# Altium PCB FrontLights.PcbDoc
Units mil, origin at the board's own origin, x right, y up, seen from the top; angles counter-clockwise.
Board outline 6000 x 4000 mil, 4 copper layers (Top Layer, GND, PWR, Bottom Layer), stack 18.512 mil thick; 29 components, 20 nets, 146 pads, 31 vias.
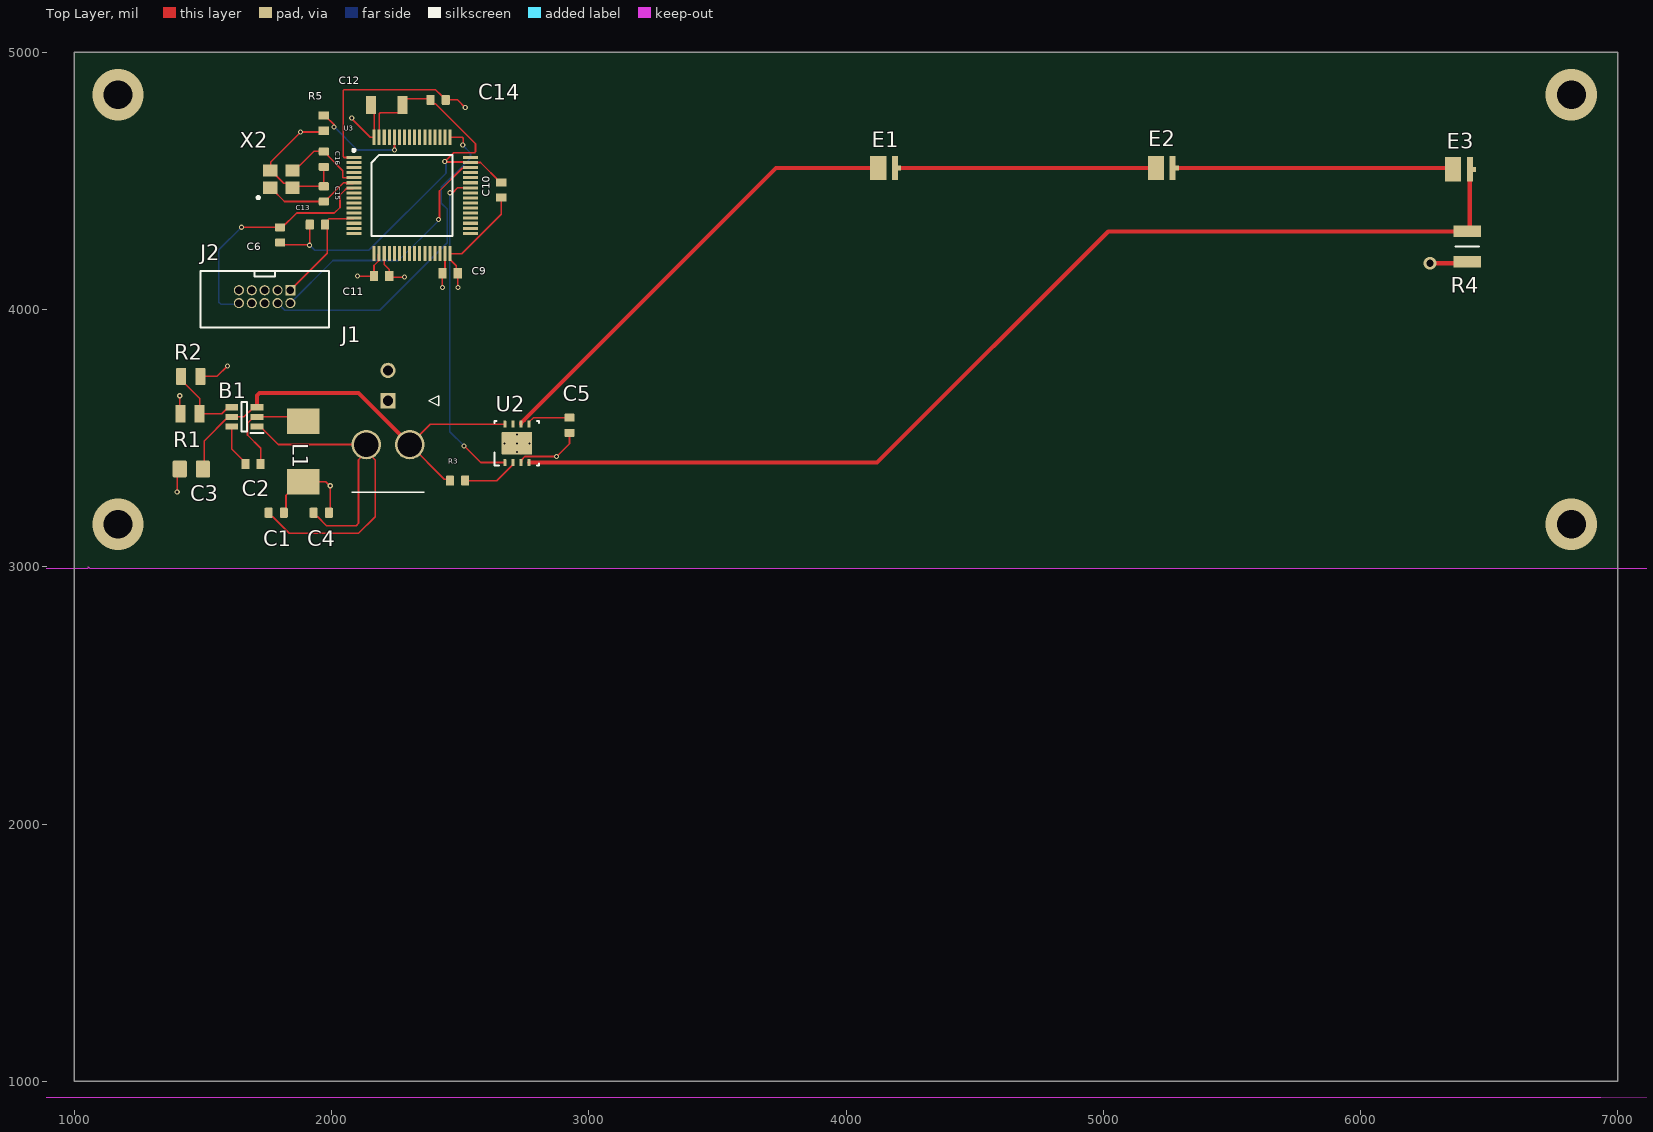
[diagram p0: Top Layer view]
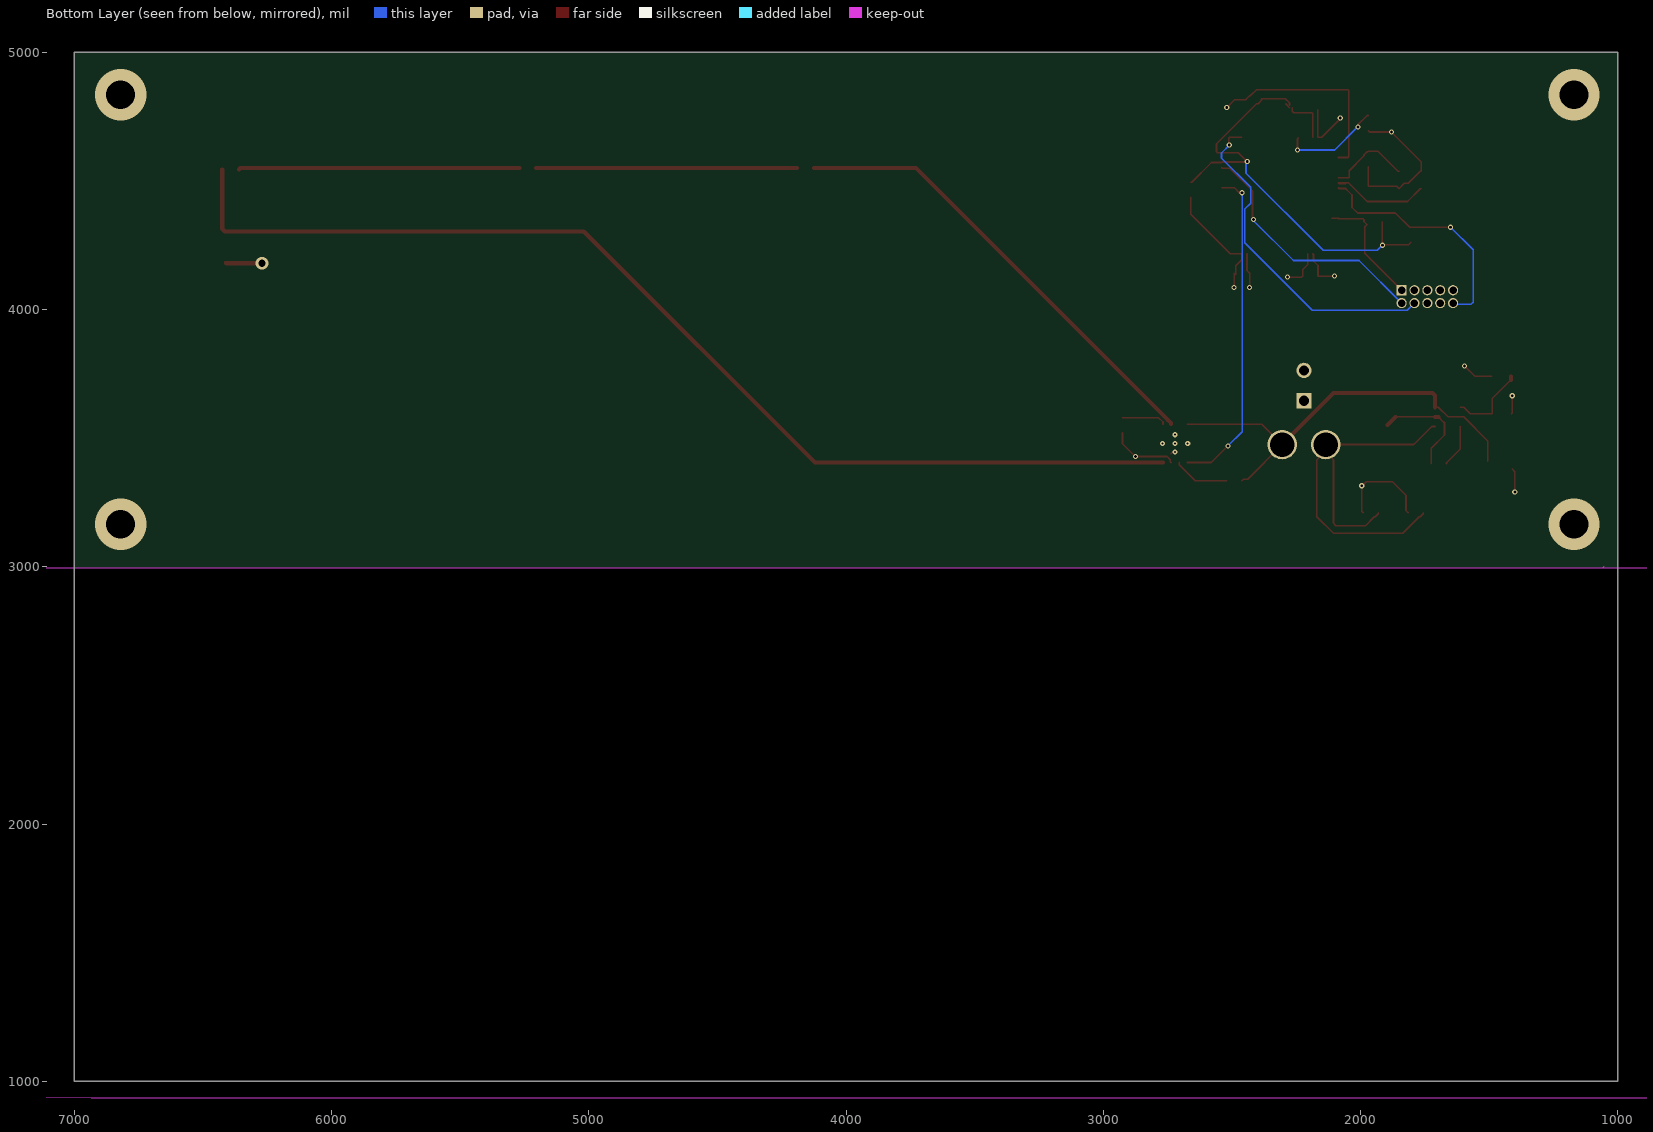
[diagram p1: Bottom Layer view, seen from below]
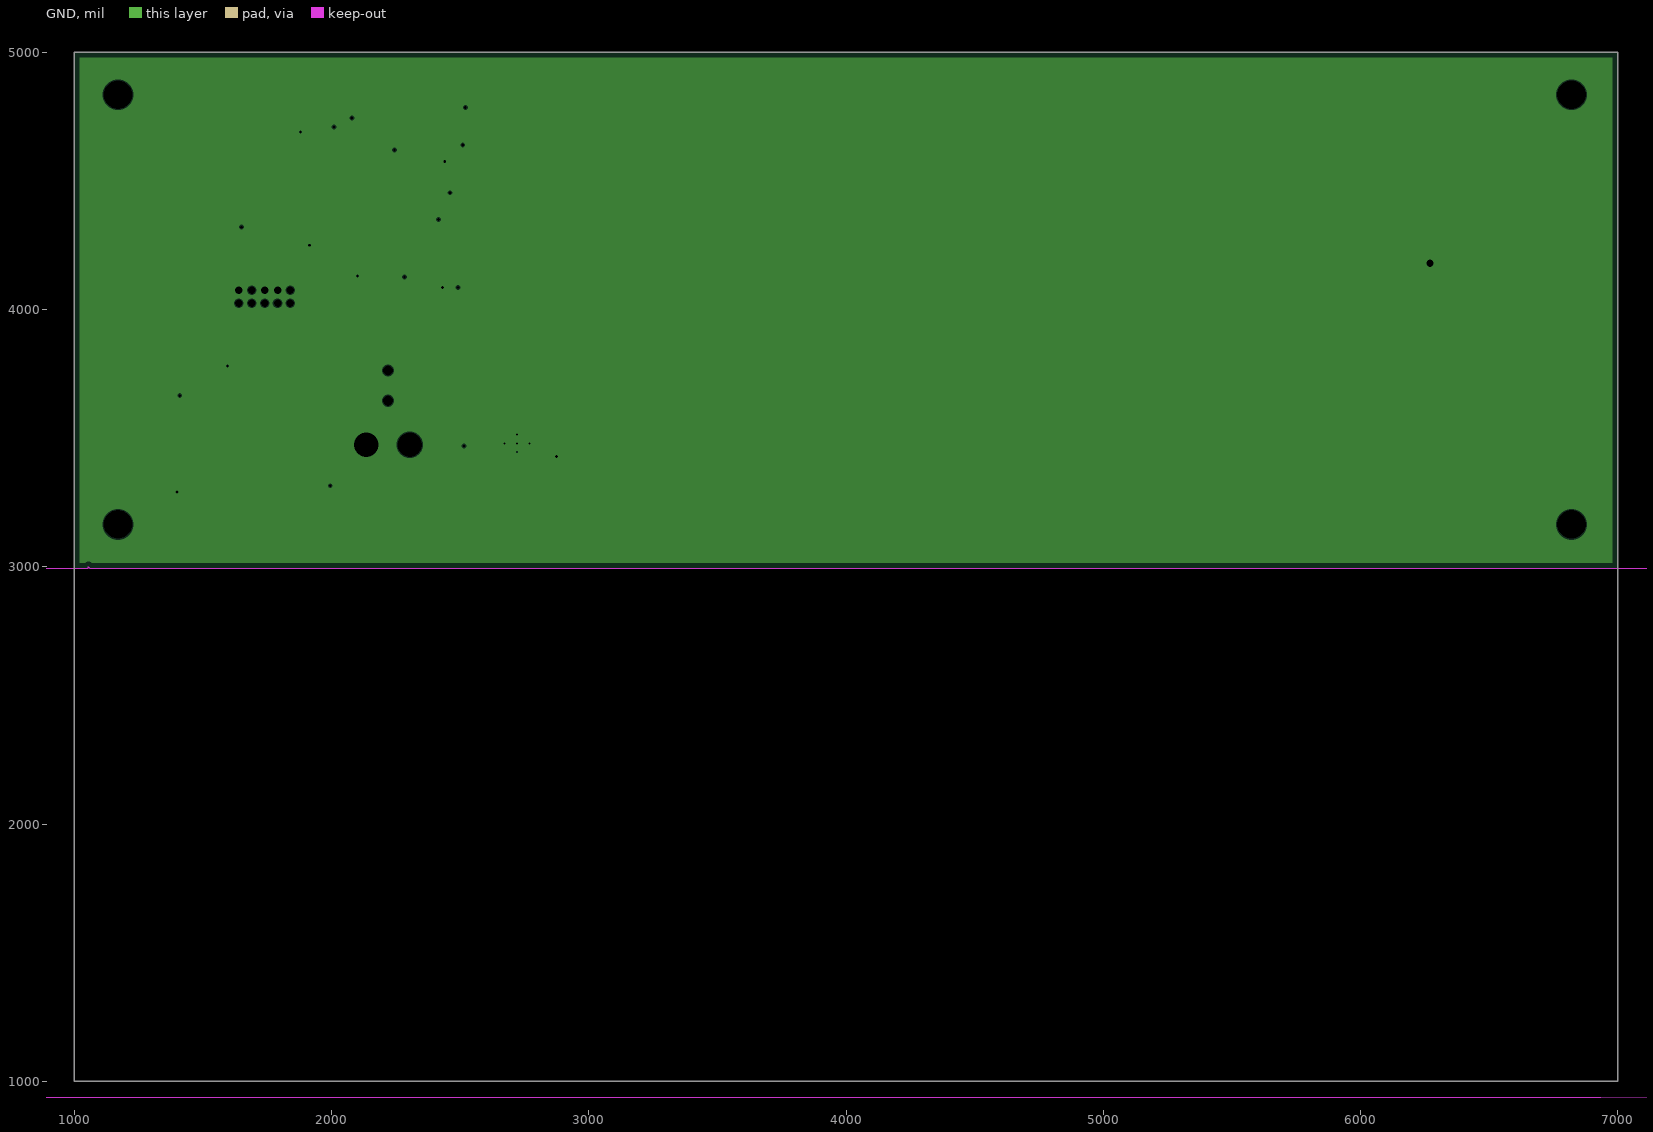
[diagram p2: GND, clearances drawn from the general rule]
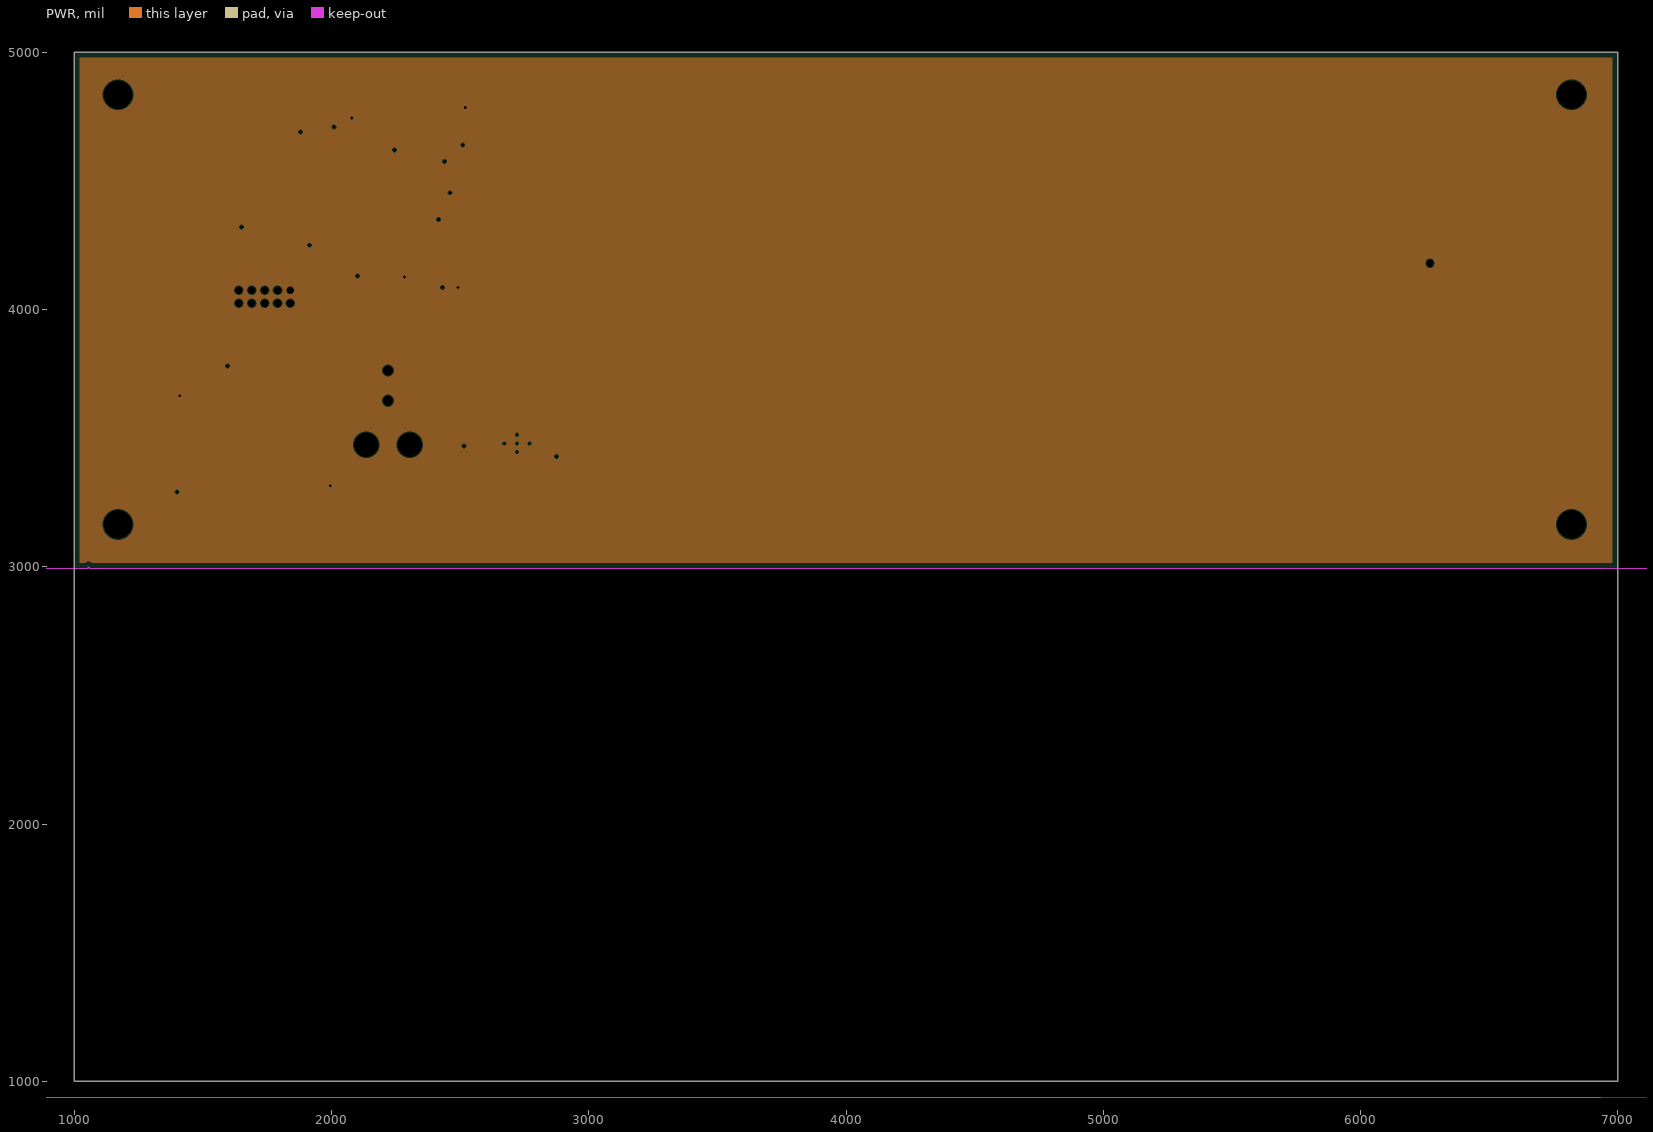
[diagram p3: PWR, clearances drawn from the general rule]
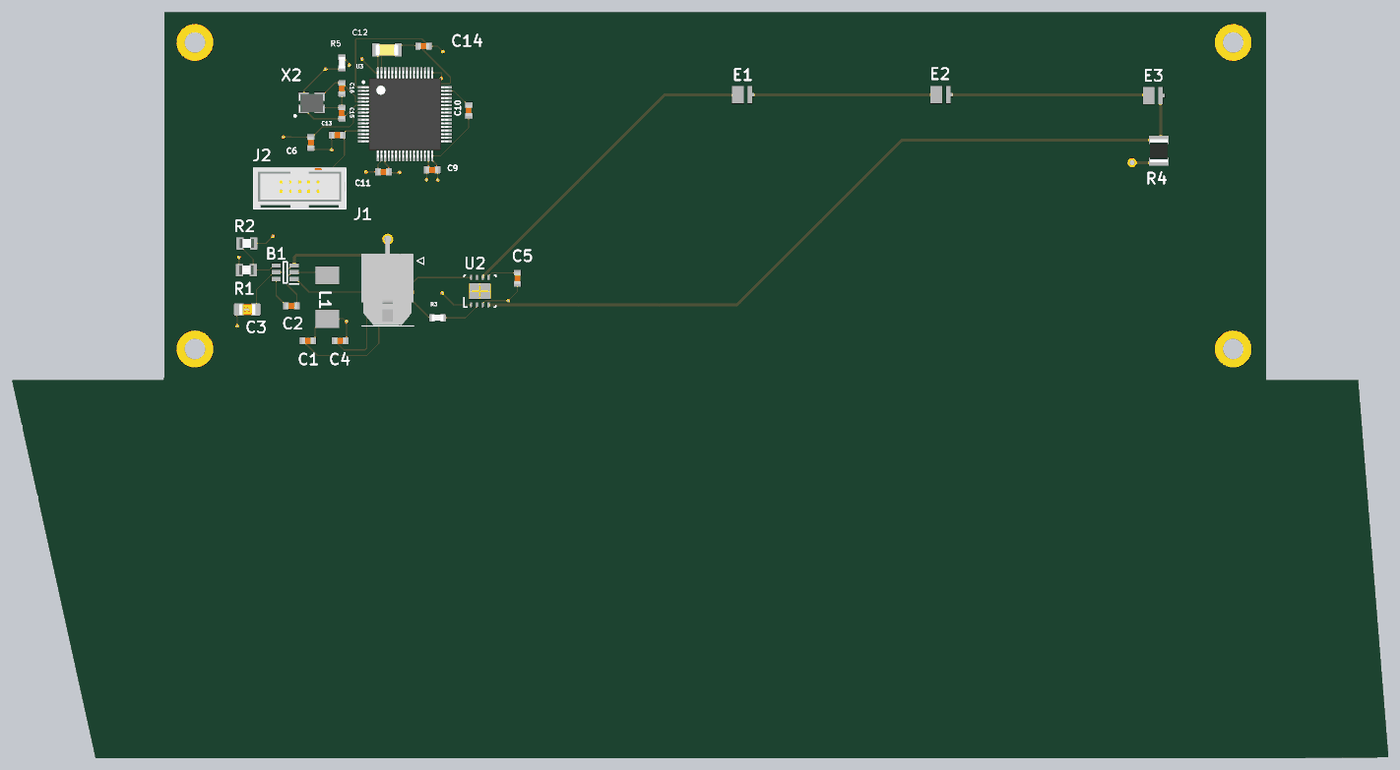
[diagram p4: 3D render of the assembled board from above, using the file's embedded part models]

## Layer stack, top to bottom
Top Solder: solder mask 1, SM-001, Dk 4
Top Layer: signal copper 1.378
Dielectric 2: prepreg 5.1, PP-017, Dk 4.3
GND: plane copper 1.378, net GND
Dielectric 6: prepreg 2.8, PP-006, Dk 4.1
PWR: plane copper 1.378, net +3V3
Dielectric 5: prepreg 5.1, PP-017, Dk 4.3
Bottom Layer: signal copper 1.378
Bottom Solder: solder mask 1, SM-001, Dk 4

## Board outline
1000,1000 7000,1000 7000,5000 1000,5000
cut-out: 1055,3000 1060,2995 7500,2995 7665,940 6935,935 629.61,935 174.61,2995 1055,2995

## Design rules (kind name [scope] priority, off if disabled: settings)
BoardOutlineClearance [All] p1: gap=7.87 ignorepadtopadclearanceinfootprint=FALSE
Clearance [All] p1: gap=4 ignorepadtopadclearanceinfootprint=FALSE except(5: Arc-Via Track-Via SMDPad-Via THPad-Via Via-Via Via-Fill Via-Poly Via-Region Via-Text; 9.84: Arc-Hole Track-Hole SMDPad-Hole THPad-Hole Via-Hole Fill-Hole Poly-Hole Region-Hole Text-Hole)
ComponentClearance [All] p1: gap=4 collisioncheckmode=3 verticalgap=4 showdistances=TRUE
DiffPairsRouting [All] p1: maxlimit=4 minlimit=4 mostfreqgap=4 toplayer_minwidth=4 toplayer_maxwidth=71497.94 toplayer_prefwidth=4 bottomlayer_minwidth=4 bottomlayer_maxwidth=71497.94 bottomlayer_prefwidth=4 maxuncoupledlength=500
Height [All] p1: minheight=0 maxheight=71497.94 prefheight=500
HoleSize [All] p1: absolutevalues=TRUE maxlimit=248.03 minlimit=7.87 maxpercent=80.000 minpercent=20.000
HoleToHoleClearance [All] p1: gap=9.84 allowstackedmicrovias=FALSE
MinimumAnnularRing [All] p1: minimumring=3
MinimumSolderMaskSliver [All] p1: minsoldermaskwidth=0
PlaneClearance [All] p1: clearance=4
PlaneConnect PlaneConnectPowerPads [InPadClass('PowerPads')] p1: planeconnectstyle=Direct reliefexpansion=20 reliefentries=4 reliefconductorwidth=10 reliefairgap=10
PlaneConnect [All] p2: pad.planeconnectstyle=Relief pad.reliefexpansion=11.81 pad.reliefentries=4 pad.reliefconductorwidth=4 pad.reliefairgap=4 via.planeconnectstyle=Direct via.reliefexpansion=11.81 via.reliefentries=4 via.reliefconductorwidth=5 via.reliefairgap=5
PolygonConnect PolygonConnectPowerPads [All vs (InPadClass('PowerPads'))] p1: connectstyle=Direct reliefconductorwidth=10 reliefentries=4 polygonreliefangle="90 Angle" airgapwidth=10
PolygonConnect [All] p2: thpad.connectstyle=Relief thpad.reliefconductorwidth=4 thpad.reliefentries=4 thpad.polygonreliefangle="90 Angle" thpad.airgapwidth=4 smdpad.connectstyle=Relief smdpad.reliefconductorwidth=4 smdpad.reliefentries=4 smdpad.polygonreliefangle="90 Angle" smdpad.airgapwidth=4 via.connectstyle=Direct via.reliefconductorwidth=5 via.reliefentries=4 via.polygonreliefangle="90 Angle" via.airgapwidth=5
RoutingVias [All] p1: holewidth=7.87 width=17.72 viastyle="Through Hole" minholewidth=7.87 minwidth=17.72 maxholewidth=248.03 maxwidth=257.87
SilkToSilkClearance [All] p1: silktosilkclearance=0
SilkToSolderMaskClearance [IsPad] p1: minsilkscreentomaskgap=4 clearancetoexposedcopper=TRUE
SolderMaskExpansion [All] p1: expansion=2.95 istentingtop=FALSE
SupplyNets "Schematic Supply Nets_2" [InNet('+3V3')] p1: voltage=0.000
SupplyNets "Schematic Supply Nets_1" [InNet('+12')] p2: voltage=0.000
SupplyNets "Schematic Supply Nets" [InNet('GND')] p3: voltage=0.000
Width [All] p1: maxlimit=71497.94 minlimit=4 preferedwidth=4
20 further rules are at their usual default settings.

## Classes and differential pairs
component class FrontLights: B1 C1 C2 C3 C4 C5 C6 C9 C11 C12 E1 E2 E3 J1 J2 L1 R1 R2 U2 U3 X2

## Components (designator, comment, footprint, x,y, rotation, side; value= is the part's Value field where it differs from the comment)
B1 "LMR51420XDDCR" SOT95P280X110-6N 1660.79,3582.6 r180 top
C1 "22uF" CAP_0603#1 1785,3210 r0 top
C2 "0603YC104J4T4A" CAP_0603#2 1695,3400 r0 top value=100nF
C3 "C0805" CAP_0805 1455,3380 r0 top
C4 "22uF" CAP_0603#1 1960,3210 r0 top
C5 "47nF" CAP_0603#1 2925,3550 r90 top
C6 "100nF" CAP_0603#1 1800,4290 r90 top
C9 "0603YC104J4T4A" CAP_0603#2 2461.01,4141.01 r0 top value=100nF
C10 "0603YC104J4T4A" CAP_0603#2 2660,4465 r270 top value=100nF
C11 "0603YC104J4T4A" CAP_0603#2 2195,4130 r0 top value=100nF
C12 "1206B475K500NT" CAP_1206 2215,4795 r180 top value=4.7µF
C13 "Comment" CAP_0603#1 1945,4330 r0 top
C14 "Comment" CAP_0603#1 2414.53,4815 r0 top
C15 "Comment" CAP_0603#1 1970,4449.53 r270 top
C16 "Comment" CAP_0603#1 1970,4584.37 r270 top
E1 "CREE LED" PCBComponent_1 4125,4550 r0 top
E2 "CREE LED" PCBComponent_1 5205,4550 r0 top
E3 "CREE LED" PCBComponent_1 6360.04,4545 r0 top
J1 "43045-0223" 43045-02YY_212223 2219.64,3645.08 r0 top
J2 "SHF-105-01-X-D-TH" SAMTEC_SHF-105-01-X-D-TH 1740,4050 r180 top
L1 "8.2uH-REAL" DR73 1890,3566.22 r270 top (schematic designator *)
R1 "0805W8F1003T5E" RES_0805#1 1450,3595 r180 top value=100kΩ
R2 "22.1K" RES_0805#2 1452.6,3740 r180 top
R3 "Comment" RES_0603#1 2490,3335 r0 top
R4 "Comment" RES_1210 6415,4245 r90 top
R5 "RT0603FRE131KL" RES_0603#2 1970,4724.53 r90 top value=1kΩ
U2 "TL4242DRJR" DRJ0008A_V 2720.75,3479.8 r90 top
U3 "STM32F072RBT7" LQFP-64-0.5mm 2313.27,4443.62 r0 top
X2 "X322516MMB4SI" 830207658809 1805,4505 r0 top

## Footprints (in the part's own frame and the unit in brackets; to place one, negate y for a bottom-side part, rotate by r counter-clockwise, add the part's x,y. Pads: shape width x height; smd on the part's side, far side on the other; paste and mask are expansions set on the pad)
43045-02YY_212223 [mm]
  rect 1.52x1.52 hole 1.02: 1(0,0)
  round 1.52 hole 1.02: 2(0,3)
  round 2.91 hole 2.41: 3(2.15,-4.32) 4(-2.15,-4.32)
  silkscreen extent -3.58,-9.02 5,0.5, body extent -3.66,-8.9 3.53,3.34, height 8.73
830207658809 [mm]
  rect 1.4x1.2 smd: 1(-1.1,-0.8) 2(1.1,-0.8) 3(1.1,0.9) 4(-1.1,0.9)
  silkscreen extent -2.41,-1.9 -2.16,-1.65, body extent -1.7,-1.25 1.7,1.25, height 1.3
CAP_0603#1 [mm]
  rrect25% 0.8x1 smd: 1(-0.75,0) 2(0.75,0)
  body extent -0.8,-0.4 0.8,0.4, height 0.51
CAP_0603#2 [mm]
  rect 0.8x1 smd: 1(-0.75,0) 2(0.75,0)
  body extent -0.8,-0.4 0.8,0.4, height 0.51
CAP_0805 [mm]
  rrect25% 1.4x1.7 smd: 1(-1.143,0) 2(1.143,0)
  body extent -1.15,-0.76 1.15,0.79, height 1.01
CAP_1206 [mm]
  rect 1x1.8 smd: 1(-1.55,0) 2(1.55,0)
  body extent -1.6,-0.8 1.6,0.8, height 0.94
DR73 [mm]
  rect 2.5x3.25 smd: 1(0,0) 2(6,0)
DRJ0008A_V [mm] "SON, 8-Leads, Body 4x4mm, Pitch 0.8mm, Thermal Pad 3x2.2mm, TI Recommended"
  rrect33% 0.7x0.3 smd: 1(-1.9,1.2) 2(-1.9,0.4) 3(-1.9,-0.4) 4(-1.9,-1.2) 5(1.9,-1.2) 6(1.9,-0.4) 7(1.9,0.4) 8(1.9,1.2)
  rrect5% 2.2x3 smd paste-1.1: 9(0,0)
  silkscreen extent -2.2,-2.2 2.2,2.2, body extent -2.05,-2.05 2.05,2.05, height 0.81
LQFP-64-0.5mm [mm] "TSQFP, 64-Leads, Body 10.00x10.00mm, Pitch 0.50mm, IPC Medium Density"
  rect 1.5x0.3 smd mask+0.05: 1(-5.75,3.75) 2(-5.75,3.25) 3(-5.75,2.75) 4(-5.75,2.25) 5(-5.75,1.75) 6(-5.75,1.25) 7(-5.75,0.75) 8(-5.75,0.25) 9(-5.75,-0.25) 10(-5.75,-0.75) 11(-5.75,-1.25) 12(-5.75,-1.75) 13(-5.75,-2.25) 14(-5.75,-2.75) 15(-5.75,-3.25) 16(-5.75,-3.75) 33(5.75,-3.75) 34(5.75,-3.25) 35(5.75,-2.75) 36(5.75,-2.25) 37(5.75,-1.75) 38(5.75,-1.25) 39(5.75,-0.75) 40(5.75,-0.25) 41(5.75,0.25) 42(5.75,0.75) 43(5.75,1.25) 44(5.75,1.75) 45(5.75,2.25) 46(5.75,2.75) 47(5.75,3.25) 48(5.75,3.75)
  rect 0.3x1.5 smd mask+0.05: 17(-3.75,-5.75) 18(-3.25,-5.75) 19(-2.75,-5.75) 20(-2.25,-5.75) 21(-1.75,-5.75) 22(-1.25,-5.75) 23(-0.75,-5.75) 24(-0.25,-5.75) 25(0.25,-5.75) 26(0.75,-5.75) 27(1.25,-5.75) 28(1.75,-5.75) 29(2.25,-5.75) 30(2.75,-5.75) 31(3.25,-5.75) 32(3.75,-5.75) 49(3.75,5.75) 50(3.25,5.75) 51(2.75,5.75) 52(2.25,5.75) 53(1.75,5.75) 54(1.25,5.75) 55(0.75,5.75) 56(0.25,5.75) 57(-0.25,5.75) 58(-0.75,5.75) 59(-1.25,5.75) 60(-1.75,5.75) 61(-2.25,5.75) 62(-2.75,5.75) 63(-3.25,5.75) 64(-3.75,5.75)
  silkscreen extent -5.87,-4 4,4.57, body extent -6,-6 6,6, height 1.6
PCBComponent_1 [mm]
  rect 1.6x2.4 smd: 1(0,0)
  rect 0.6x2.4 smd: 2(1.65,0)
  rect 0.3x0.5 smd: 3(2.1,0)
RES_0603#1 [mm]
  rrect25% 0.8x1 smd: 1(-0.75,0) 2(0.75,0)
  body extent -0.8,-0.43 0.8,0.43, height 0.52
RES_0603#2 [mm]
  rect 0.8x1 smd: 1(-0.75,0) 2(0.75,0)
  body extent -0.8,-0.43 0.8,0.43, height 0.52
RES_0805#1 [mm]
  rect 1x1.7 smd: 1(-0.95,0) 2(0.95,0)
  body extent -1,-0.63 1,0.63, height 0.47
RES_0805#2 [mm]
  rrect25% 1x1.7 smd: 1(-0.95,0) 2(0.95,0)
  body extent -1,-0.63 1,0.63, height 0.47
RES_1210 [mm]
  rect 1.1x2.7 smd: 1(-1.5,0) 2(1.5,0)
  silkscreen extent 0,-1.15 0,1.15, body extent -1.6,-1.25 1.6,1.25, height 0.6
SAMTEC_SHF-105-01-X-D-TH [mm]
  rect 1x1 / inner round 1 / far side rect 1x1 hole 0.74: 1(-2.54,-0.635)
  round 1 hole 0.74: 2(-2.54,0.635) 3(-1.27,-0.635) 4(-1.27,0.635) 5(0,-0.635) 6(0,0.635) 7(1.27,-0.635) 8(1.27,0.635) 9(2.54,-0.635) 10(2.54,0.635)
  silkscreen extent -6.35,-2.54 6.35,3.05, body extent -6.35,-2.54 6.35,3.05, height 5.35
SOT95P280X110-6N [mm]
  rect 1.25x0.6 smd: 1(-1.25,0.95) 2(-1.25,0) 3(-1.25,-0.95) 4(1.25,-0.95) 5(1.25,0) 6(1.25,0.95)
  silkscreen extent -1.88,-1.45 0.27,1.6

## Part data
B1: "Switching Voltage Regulators SIMPLE SWITCHER power converter 4.5-V to 36-V, 2-A, synchronous buck with 40-uA IQ", Manufacturer_Name="Texas Instruments", Mouser Part Number=595-LMR51420XDDCR, Datasheet Link=https://www.ti.com/lit/ds/symlink/lmr51420.pdf?ts=1663231243064, Geometry.Height=1.1mm, Manufacturer_Part_Number=LMR51420XDDCR, Mouser Price/Stock=https://www.mouser.co.uk/ProductDetail/Texas-Instruments/LMR51420XDDCR?qs=vvQtp7zwQdN6fBqQU4azxw%3D%3D
C1 C4 C5: library part CAP_0603, "Capacitor SMD 0603"
C2 C9 C10 C11: library part CMP-001-00084-3, "0.1uF 16V X7R 5% 0603T/R", Capacitor Type="Ceramic Capacitor X7R", Case/Package=0603, Mounting Technology=SMD, RoHS Compliant=Yes
C3: library part CAP_0805, "Capacitor SMD 0805"
C6: library part CAP_0603_16V, "Capacitor SMD 0603 16V"
C12: library part CMP-001-00145-1, "4.7uF 50V X7R ±10% 1206 Multilayer Ceramic Capacitors MLCC - SMD/SMT ROHS", JLCPCB Part #=C29823, Voltage Rating=50V
J1: library part CMP-002-00092-2, "2 Pos. Micro-Fit 3.0 Right-Angle Header", Manufacturer_Name=Molex, Mouser Part Number=538-43045-0223, Datasheet Link=https://www.molex.com/pdm_docs/sd/430450221_sd.pdf, Design Item ID=43045-0223, Height=8.77mm, Manufacturer_Part_Number=43045-0223, Mouser Price/Stock=https://www.mouser.co.uk/ProductDetail/Molex/43045-0223?qs=vFIbPToLYxJo8rgMyoDzIw%3D%3D, Source=SamacSys.SchLib
J2: library part CMP-002-00085-3, "JTAG 10-Pin Header 1.27mm", Case/Package=None, Availability=Unavailable, Component Type=Standard, Design Item ID=SHF-105-01-X-D-TH, MF=Samtec, MP=SHF-105-01-X-D-TH, Pins=10, Price=None, Source=SHF-105-01-X-D-TH.SchLib
R1: library part CMP-009-00203-1, "100kΩ 0805 Thick Film 125mW 1% 150V", Case/Package=0805, JLCPCB Part #=C149504, Max Operating Temperature=155°C, Min Operating Temperature=-55°C, Power=125mW, Tolerance=1%, Voltage Rating=150V, Mounting Technology="Surface Mount", Pins=2, RoHS Compliant=Yes
R2: library part RES_0805, "Resistor SMD 0805"
R5: library part CMP-009-00182-2, "1k 0603 Thin Film Res 1% 1/10W ±50ppm/°C Molded SMD Paper T/R", Case/Package=0603, Max Operating Temperature=125°C, Min Operating Temperature=-55°C, Tolerance=1%, Voltage Rating=75V, RoHS Compliant=Yes
U2: library part CMP-0388-00226-2, "Adjustable LED Driver, 4.5 to 42 V, -40 to 150 degC, 8-pin SON (DRJ8), Green (RoHS & no Sb/Br)", Manufacturer="Texas Instruments", Rating=Catalog, Code_JEDEC=MO-229, ComponentLink1Description="Manufacturer URL", ComponentLink1URL=http://www.ti.com/, ComponentLink2Description=Datasheet, ComponentLink2URL=http://www.ti.com/general/docs/lit/getliterature.tsp?genericPartNumber=TL4242&fileType=pdf, ComponentLink3Description="Package Specification", ComponentLink3URL=http://www.ti.com/lit/ds/symlink/sn55hvd251.pdf, DatasheetVersion=SLVS641A, Eco-Plan="Green (RoHS & no Sb/Br)", Mounting Technology="Surface Mount", PackageDescription="8-Pin Plastic Small Outline, Body 4 x 4 mm, Pitch 0.8 mm", PackageReference=DRJ0008A, PackageVersion=4205439/C, PartNumber=TL4242DRJR, SubFamily="LED Driver", Vin(Max)(V)=42, Vin(Min)(V)=4.5
U3: library part CMP-020-00026-1, "MCU 32-Bit ARM Cortex-M0 RISC 64KB Flash 2V to 3.6V 64-Pin LQFP Tray", Case/Package=LQFP, Frequency=48MHz, Max Operating Temperature=105°C, Min Operating Temperature=-40°C, Interface=I2C,SPI,USB,HDMI,IrDA,UART,USART, Mounting Technology="Surface Mount"
X2: library part CMP-018-000014-4, "16MHz Oscillator 10pF 10ppm 3.2 x 2.5mm", Case/Package="3.2mm x 2.5mm", Frequency=16MHz, JLCPCB Part #=C112972, Load Capacitance=10pF, Manufacturer_Name=YXC, Mouser Part Number=710-830207658809, Datasheet Link=https://www.we-online.com/catalog/datasheet/830207658809.pdf, Design Item ID=830207658809, Height=1.2mm, Manufacturer_Part_Number=X322516MMB4SI, Mouser Price/Stock=https://www.mouser.co.uk/ProductDetail/Wurth-Elektronik/830207658809?qs=hWgE7mdIu5QE%2FCurpvqJsA%3D%3D, Source=SamacSys.SchLib

## Via types
v1: diameter 20, hole 11.2, Top Layer to Bottom Layer, 20 vias
v2: diameter 19.68, hole 7.87, Top Layer to Bottom Layer, 5 vias
v3: diameter 200, hole 112, Top Layer to Bottom Layer, 4 vias
v4: diameter 20/20 (per signal layer), hole 11.2, Top Layer to Bottom Layer, 1 vias
v5: diameter 50, hole 28, Top Layer to Bottom Layer, 1 vias

## Nets (pads, with @x,y where several pads share a name; then routed paths per layer and width w, separated by ;. In a path a pad name is that pad's centre, name@x,y a point inside that pad or via, vN(x,y) a via of type N, cw(c..) or ccw(c..) an arc to the next point about the centre after c; other vN are vias at no path point)
+3V3: C1.2 C4.2 C9.2 C10.2 C11.2 C12.2 C13.2 C14.2 J2.1 L1.2 R1.2 U3.1 U3.13 U3.19 U3.32 U3.64 | length 2582.3
  Top Layer w6.5: v1(1410,3665) 1410,3597.6 R1.2 ; C1.2 1823.09,3218.56 1823.09,3277.85 1875.24,3330 1977.47,3330 1992.47,3315 v1(1995,3315) 1995,3215.47 C4.2 ; J2.1 1983.25,4218.25 1983.25,4321.28 C13.2 1986.6,4342.07 1986.6,4348.43 1990.83,4352.66 2084.51,4352.66 U3.13 U3.13@2110.51,4355.04 ; v1(2078.75,4745) 2078.75,4741.25 2150,4670 U3.64 C12.2@2165.63,4775.35 ; U3.1 2048.81,4591.26 2045,4595.07 2045,4851.19 2048.81,4855 2404.06,4855 2428.04,4831.01 2431.61,4831.01 2444.06,4818.57 C14.2 2490,4815 v1(2520,4785) ; U3.19 2205,4175 2224.06,4155.94 C11.2@2224.06,4130 ; C11.2 2229.53,4125 2282.89,4125 v1(2284.18,4126.29) ; C9.2@2484.53,4135 2484.53,4170 2460.91,4193.62 U3.32 2506.59,4217.24 2660,4370.65 C10.2 ; C9.2 2491.01,4140.54 v1(2491.01,4086.01)
+12: B1.3 B1.5 C3.2 J1.3 R3.1 U2.8 | length 1710.2
  Top Layer w6.5: C3.2@1505,3410 1505,3415.9 ; B1.3 1697.21,3620 1659.8,3582.59 B1.5 1598.78,3582.59 1505,3488.81 1505,3445 ; R3.1@2460.31,3334.69 2454.49,3340.51 2438.78,3340.51 J1.3 2383.9,3554.61 U2.8 ; 1505,3415.9 1505,3445 ; 1505,3415.9 1505,3445
  Top Layer w16: B1.3 1710,3665.63 1719.37,3675 2104.29,3675 J1.3
GND: B1.1 C1.1 C3.1 C4.1 C5.1 C6.1 C9.1 C10.1 C11.1 C12.1 C13.1 C14.1 C15.1 C16.2 J1.4 J2.3 J2.5 J2.9 R2.1 R4.1 R5.1 U2.3 U2.9 U3.18 U3.31 U3.47 U3.63 X2.2 X2.4 | length 5186.3
  Top Layer w6.5: v1(1400,3290) 1400,3370 C3.1 ; R2.1 1555,3740 v1(1595,3780) ; B1.1 1722.8,3545.19 1792.99,3475 J1.4 2135,3450.2 2170,3415.2 2170,3195 2105,3130 1835.47,3130 1771.48,3193.99 1767.92,3193.99 1755.47,3206.43 C1.1 ; C6.1@1805,4260.47 1813.56,4251.91 1913.09,4251.91 v4(1915,4250) ; v4@1915,4250.64 C13.1@1915,4341.03 ; C4.1 1930.47,3206.43 1942.92,3193.99 1946.48,3193.99 1980.47,3160 2096.19,3160 2105.13,3168.94 2105.13,3415.89 J1.4@2135,3445.76 ; C16.2 C15.1 1859.06,4479.06 1850,4470 1829.63,4490.37 1813.88,4490.37 1767.32,4536.93 1763.39,4536.93 1763.39,4573.39 v1(1880,4690) 1965,4690 R5.1 ; v1(2100.47,4130) C11.1 ; C11.1@2165,4130 2165,4170.93 2182.66,4188.59 2182.66,4214.59 U3.18 ; U3.63 2185,4670.31 2185,4761.19 2188.81,4765 2259.59,4765 2265,4770.41 C12.1@2265,4785 ; C12.1@2276.02,4785 C12.1@2291.02,4800 ; C12.1 2276.02,4803.56 2292.46,4820 2385,4820 2385,4812.99 2397.45,4800.54 2404.46,4800.54 2560,4645 2560,4613.58 2556.19,4609.78 2474.78,4609.78 v1(2440,4575) 2441.71,4573.29 2537.93,4573.29 U3.47 2579.02,4571.58 2656.06,4494.53 C10.1 ; v1(2431.01,4086.01) 2431.01,4140.54 2441.22,4150.75 U3.31 ; v2(2720.75,3446.34) 2729.9,3446.34 U2.9@2736.5,3439.74 ; U2.3 2739.15,3407.66 2739.15,3416.04 2751.56,3428.44 v1(2875,3428.44) ; v1@2876.72,3430.16 2925,3478.44 C5.1 ; R4.1@6409.06,4180 R4.1
  Top Layer w16: v5(6270,4180) R4.1@6409.06,4180
  Bottom Layer w6.5: v4(1915,4250) 1935,4230 2145,4230 2445.25,4530.25 2445.25,4569.75 v1(2440,4575)
  other v2: 2671.54,3479.8 2720.75,3479.8 2769.96,3479.8 2720.75,3513.27
LED_EN: U2.1 U3.42 | length 1279.8
  Top Layer w6.5: v1(2460,4454.04) 2470.93,4454.04 2490.04,4473.15 U3.42 ; v1(2515,3470) 2580,3405 U2.1
  Bottom Layer w6.5: v1(2460,4454.04) 2460,3525 v1(2515,3470)
LED_RES: 
Net*_1: B1.2 C2.2 L1.1 | length 425.4
  Top Layer w6.5: 1673.4,3561.97 1673.4,3512.4 1724.53,3461.26 C2.2 ; 1674.99,3560.38 B1.2@1697.21,3582.59 ; B1.2 L1.1@1863.63,3582.59
  Top Layer w16: B1.2@1697.21,3582.59 B1.2 ; L1.1@1863.63,3582.59 L1.1@1895,3551.22
NetB1_4: B1.4 R1.1 R2.2 | length 309.4
  Top Layer w6.5: R2.2@1415.2,3726.22 1487.4,3654.02 R1.1 1573.78,3595 1598.78,3620 B1.4
  Top Layer w16: R2.2@1415.2,3726.22 R2.2
NetB1_6: B1.6 C2.1 | length 167.5
  Top Layer w6.5: B1.6 1611.58,3457.83 1665.47,3403.94 C2.1
NetC5_2: C5.2 U2.5 | length 171.9
  Top Layer w6.5: U2.5 2767.99,3562.48 2785.04,3579.53 C5.2
NetC15_1: C15.2 U3.6 X2.1 | length 404.1
  Top Layer w6.5: X2.1@1763.39,4470 1767.32,4470 1817.32,4420 C15.2 1973.94,4420 2046.77,4492.84 U3.6 2084.23,4490.18 U3.6@2058.23,4490.18
NetC16_1: C16.1 U3.5 X2.3 | length 329.5
  Top Layer w6.5: X2.3@1850,4536.93 1853.94,4536.93 1932.01,4615 C16.1@1970,4615 ; C16.1 1973.57,4613.9 1986.01,4601.45 1986.01,4597.89 2043.82,4540.08 2043.82,4512.52 U3.5
NetE1_1: E1.1 U2.6 | length 1803.2
  Top Layer w16: U2.6 2736.5,3558.29 2749.9,3571.7 2749.9,3572.03 3727.87,4550 E1.1
NetE1_2: E1.2 E1.3 E2.1 | length 1015
  Top Layer w16: E1.2 E2.1
NetE2_2: E2.2 E2.3 E3.1 | length 1092.2
  Top Layer w16: E2.2 6355.04,4550 E3.1
NetR3_2: R3.2 U2.2 | length 219.2
  Top Layer w6.5: R3.2@2519.53,3334.69 2642.56,3334.69 2705,3397.13 U2.2
NetR5_2: R5.2 U3.60 | length 383.9
  Top Layer w6.5: R5.2 1973.94,4754.06 2010,4717.99 v1(2010,4710) ; U3.60@2241.71,4667.34 2244.68,4664.37 2244.68,4620.31 v1(2245,4620)
  Bottom Layer w6.5: v1(2010,4710) 2100,4620 v1(2245,4620)
nRESET: C6.2 J2.10 U3.7 | length 953.6
  Top Layer w6.5: v1(1650,4320) 1689.95,4320 1690.42,4319.53 1808.94,4319.53 1864.41,4375 2011.19,4375 2032.78,4396.58 2032.78,4445.04 2054.36,4466.62 2058.23,4470.49 2084.23,4470.49 U3.7
  Bottom Layer w6.5: v1(1650,4320) 1562.14,4232.14 1562.14,4028.13 1570.27,4020 J2.10@1655,4020
REF: E3.2 E3.3 R4.2 U2.4 | length 4264.5
  Top Layer w16: U2.4 4120.44,3405 5019.5,4304.06 R4.2 6425,4314.06 E3.2
SWCLK: J2.4 U3.49 | length 1308
  Top Layer w6.5: U3.49 2507.87,4670 2511.68,4666.19 2511.68,4641.68 v1(2510,4640)
  Bottom Layer w6.5: J2.4 1817.66,3997.34 2187.34,3997.34 2449.5,4259.5 2449.5,4390.65 2426.75,4413.4 2426.75,4475.07 2540,4588.32 2540,4608.7 2510,4638.7 v1(2510,4640)
SWDIO: J2.2 U3.46 | length 983
  Top Layer w6.5: v1(2416.25,4350) 2420,4353.75 2420,4461.06 2508.17,4549.23 2536.99,4549.23 U3.46
  Bottom Layer w6.5: J2.2 2005.64,4190.64 2260.64,4190.64 2416.25,4346.25 v1(2416.25,4350)
pads on no net: J1.1 J1.2 J2.6 J2.7 J2.8 U2.7 U3.2 U3.3 U3.4 U3.8 U3.9 U3.10 U3.11 U3.12 U3.14 U3.15 U3.16 U3.17 U3.20 U3.21 U3.22 U3.23 U3.24 U3.25 U3.26 U3.27 U3.28 U3.29 U3.30 U3.33 U3.34 U3.35 U3.36 U3.37 U3.38 U3.39 U3.40 U3.41 U3.43 U3.44 U3.45 U3.48 U3.50 U3.51 U3.52 U3.53 U3.54 U3.55 U3.56 U3.57 U3.58 U3.59 U3.61 U3.62
copper on no net:
  other v3: 1170,3165 6820,3165 1170,4835 6820,4835

## Polygon pours and split planes (outlines as drawn)
GND on GND (split plane): 6979.9,3015.1 1068.13,3015.1 1066.17,3016.71 1062.69,3018.57 1058.92,3019.71 1055,3020.1 1051.08,3019.71 1047.31,3018.57 1043.83,3016.71 1041.87,3015.1 1020.1,3015.1 1020.1,4979.9 6979.9,4979.9
+3V3 on PWR (split plane): 6979.9,3015.1 1068.13,3015.1 1066.17,3016.71 1062.69,3018.57 1058.92,3019.71 1055,3020.1 1051.08,3019.71 1047.31,3018.57 1043.83,3016.71 1041.87,3015.1 1020.1,3015.1 1020.1,4979.9 6979.9,4979.9